# EAGLE board 2x4_v1_CS_print (EAGLE 5.06)
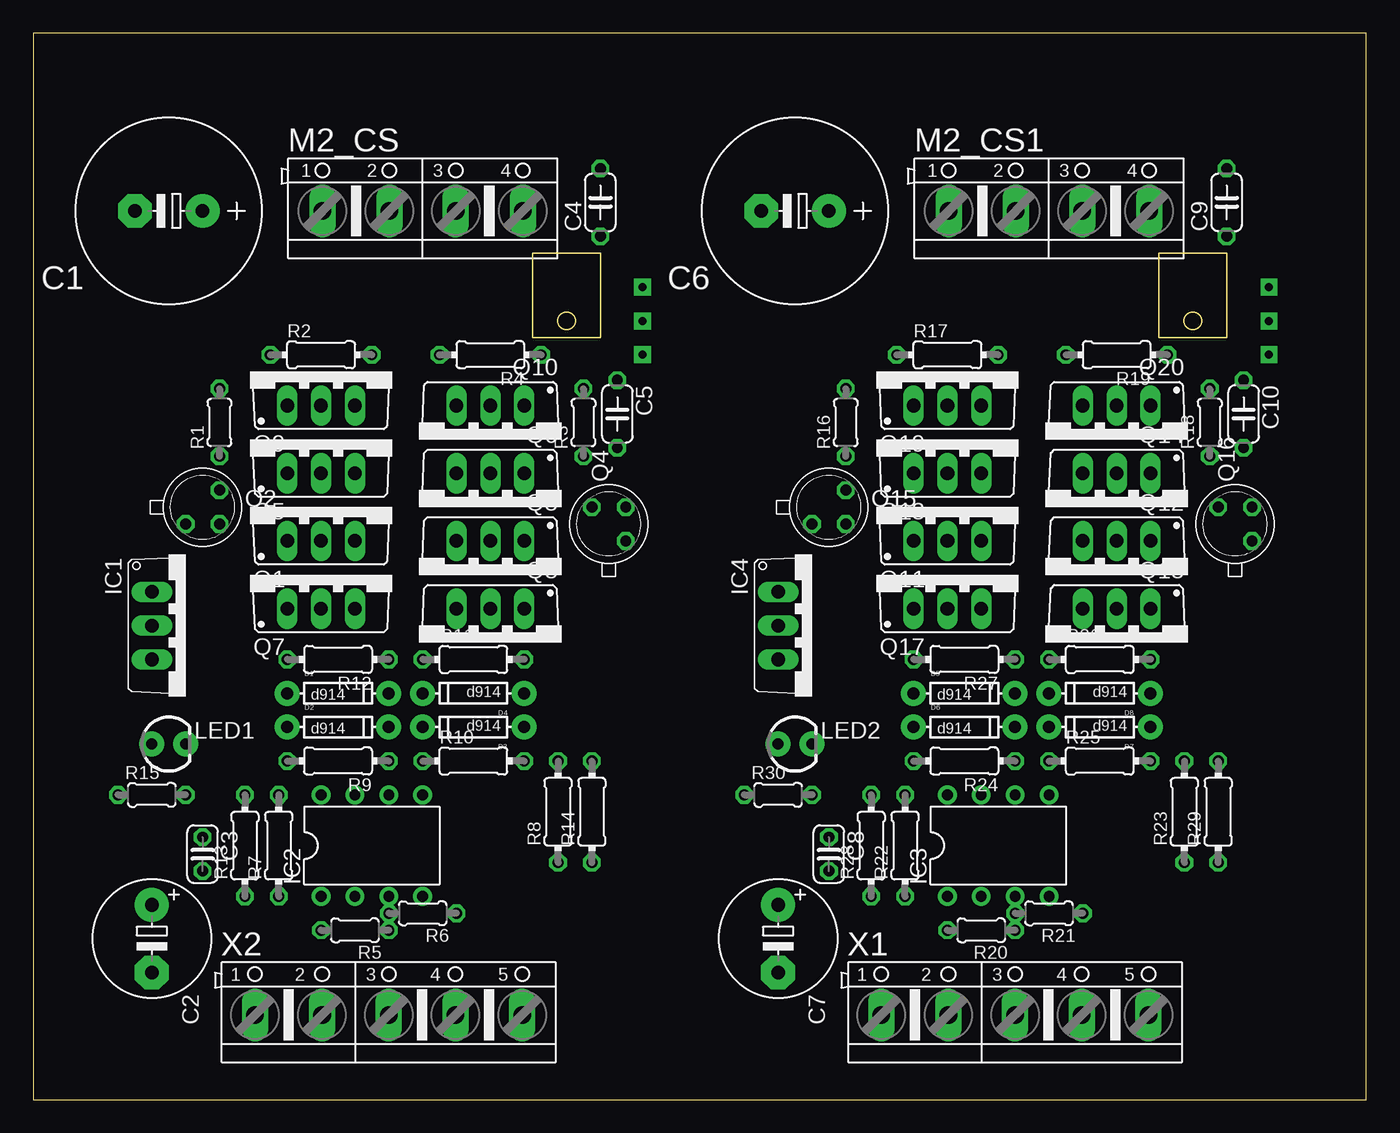
[diagram p0: board, top side]
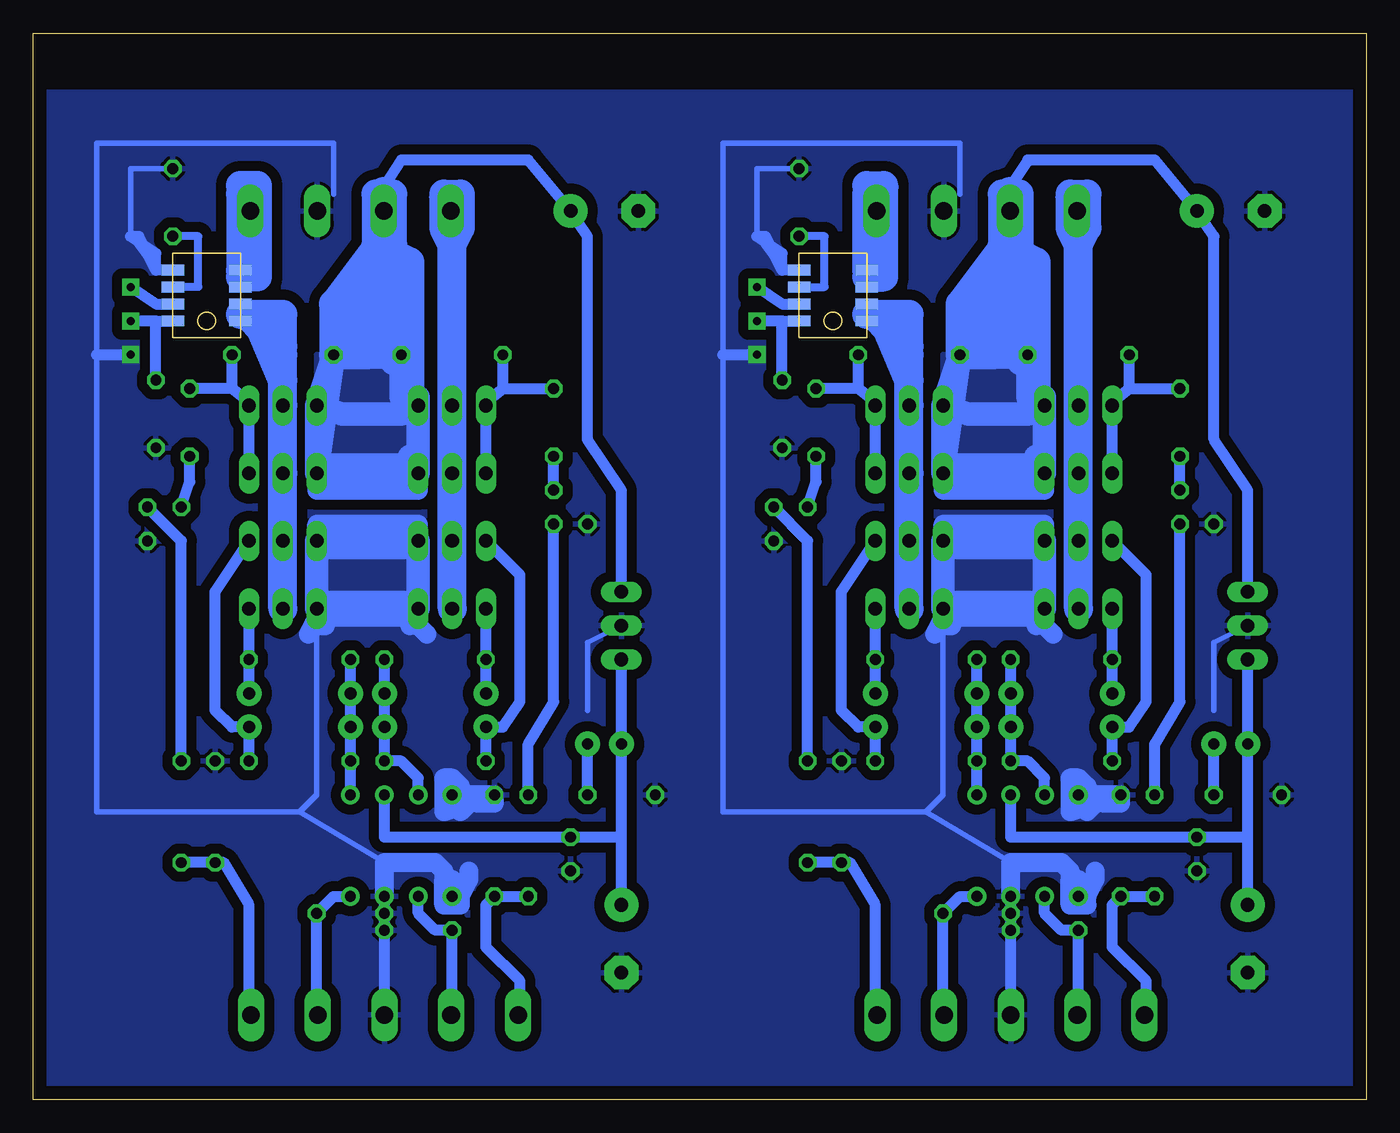
[diagram p1: board, bottom side, seen from below]

Size 100 x 80 mm. Coordinates in mm from the lower left corner, seen from the top.
Outline: 0,0 100,0 100,80 0,80 0,0
Copper layers (1*16): Top 0.035mm / dielectric 1.5mm / Bottom 0.035mm
Design rules "default *": minimum track width 10mil, minimum drill 24mil, track to track 30mil, track to pad 30mil, pad to pad 8mil, via to via 8mil, smd to smd 8mil, copper to edge 40mil, drill to drill 8mil, minimum pad ring 10mil, minimum via ring 8mil, stop-mask expansion 4mil, vias tented up to drill 0mil, thermal gap 10mil

## Footprints (pad centres in the part's own frame; a part is rotated, then mirrored left to right if it is on the bottom)
E5-13 = drill 1.016 pad 2.54 round: + -2.54,0 | drill 1.016 pad 2.54 octagon: - 2.54,0
E5-8,5 = drill 1.016 pad 2.54 round: + -2.54,0 | drill 1.016 pad 2.54 octagon: - 2.54,0
C025-024X044 = drill 0.813 octagon: 1 -1.27,0; 2 1.27,0
C050-024X044 = drill 0.813 octagon: 1 -2.54,0; 2 2.54,0
DIODE-1N4148 = drill 0.9 pad 1.88 round: A -3.81,0; C 3.81,0
TO220V = drill 1.016 long: 1 -2.54,-2.54; 2 0,-2.54; 3 2.54,-2.54
DIL08 = drill 0.8 pad 1.4 round: 1 -3.81,-3.81; 2 -1.27,-3.81; 3 1.27,-3.81; 4 3.81,-3.81; 5 3.81,3.81; 6 1.27,3.81; 7 -1.27,3.81; 8 -3.81,3.81
LED3MM = drill 0.813 pad 1.88 round: A -1.27,0; K 1.27,0
AK500/4 = drill 1.321 long: 1 -7.518,0; 2 -2.489,0; 3 2.489,0; 4 7.518,0
TO220BV = drill 1.016 long: D 0,-2.54; G -2.54,-2.54; S 2.54,-2.54
TO-52 = drill 0.813 octagon: 1 -1.27,-1.27; 2 1.27,-1.27; 3 1.27,1.27
0204/5 = drill 0.813 octagon: 1 -2.54,0; 2 2.54,0
0204/7 = drill 0.813 octagon: 1 -3.81,0; 2 3.81,0
ACS714 = smd 0.813 x 1.676: 1 -1.905,-2.54; 2 -0.635,-2.54; 3 0.635,-2.54; 4 1.905,-2.54; 5 1.905,2.54; 6 0.635,2.54; 7 -0.635,2.54; 8 -1.905,2.54
AK500/5 = drill 1.321 long: 1 -10.033,0; 2 -5.004,0; 3 0,0; 4 5.004,0; 5 10.008,0

## Placement (x,y rotation side)
C1  1000uF  [E5-13]  10.16,66.67 180 top
C2  470uF  [E5-8,5]  8.89,12.06 270 top
C3  1uF  [C025-024X044]  12.7,18.41 270 top
C4  [C050-024X044]  42.55,67.31 90 top
C5  [C050-024X044]  43.81,51.44 270 top
C6  1000uF  [E5-13]  57.15,66.67 180 top
C7  470uF  [E5-8,5]  55.88,12.06 270 top
C8  1uF  [C025-024X044]  59.69,18.41 270 top
C9  [C050-024X044]  89.53,67.31 90 top
C10  [C050-024X044]  90.81,51.44 270 top
D1  d914  [DIODE-1N4148]  22.86,30.48 0 top
D2  d914  [DIODE-1N4148]  22.86,27.94 0 top
D3  d914  [DIODE-1N4148]  33.02,27.94 180 top
D4  d914  [DIODE-1N4148]  33.02,30.48 180 top
D5  d914  [DIODE-1N4148]  69.85,30.48 0 top
D6  d914  [DIODE-1N4148]  69.85,27.94 0 top
D7  d914  [DIODE-1N4148]  80.01,27.94 180 top
D8  d914  [DIODE-1N4148]  80.01,30.48 180 top
IC1  7812TV  [TO220V]  11.43,35.56 270 top
IC2  IR4427  [DIL08]  25.4,19.05 0 top
IC3  IR4427  [DIL08]  72.39,19.05 0 top
IC4  7812TV  [TO220V]  58.42,35.56 270 top
LED1  [LED3MM]  10.16,26.67 0 top
LED2  [LED3MM]  57.15,26.67 0 top
M2_CS  [AK500/4]  29.21,66.67 0 top
M2_CS1  [AK500/4]  76.2,66.67 0 top
Q1  [TO220BV]  21.59,44.45 0 top
Q2  2n7000  [TO-52]  12.7,44.45 0 top
Q3  [TO220BV]  34.29,39.37 180 top
Q4  2n7000  [TO-52]  43.18,43.18 90 top
Q5  [TO220BV]  21.59,49.53 0 top
Q6  [TO220BV]  34.29,44.45 180 top
Q7  [TO220BV]  21.59,39.37 0 top
Q8  [TO220BV]  34.29,34.29 180 top
Q9  [TO220BV]  21.59,54.61 0 top
Q10  [TO220BV]  34.29,49.53 180 top
Q11  [TO220BV]  68.58,44.45 0 top
Q12  [TO220BV]  81.28,39.37 180 top
Q13  [TO220BV]  68.58,49.53 0 top
Q14  [TO220BV]  81.28,44.45 180 top
Q15  2n7000  [TO-52]  59.69,44.45 0 top
Q16  2n7000  [TO-52]  90.17,43.18 90 top
Q17  [TO220BV]  68.58,39.37 0 top
Q18  [TO220BV]  81.28,34.29 180 top
Q19  [TO220BV]  68.58,54.61 0 top
Q20  [TO220BV]  81.28,49.53 180 top
R1  2.2k  [0204/5]  13.97,50.8 90 top
R2  2.2k  [0204/7]  21.59,55.88 0 top
R3  2.2k  [0204/5]  41.27,50.8 90 top
R4  2.2k  [0204/7]  34.29,55.88 180 top
R5  10k  [0204/5]  24.13,12.7 180 top
R6  10k  [0204/5]  29.21,13.97 180 top
R7  10k  [0204/7]  18.41,19.05 90 top
R8  10k  [0204/7]  39.37,21.59 90 top
R9  150  [0204/7]  22.86,25.4 180 top
R10  150  [0204/7]  33.02,25.4 0 top
R11  150  [0204/7]  33.02,33.02 0 top
R12  150  [0204/7]  22.86,33.02 180 top
R13  150  [0204/7]  15.88,19.05 90 top
R14  150  [0204/7]  41.91,21.59 90 top
R15  [0204/5]  8.89,22.86 0 top
R16  2.2k  [0204/5]  60.96,50.8 90 top
R17  2.2k  [0204/7]  68.58,55.88 0 top
R18  2.2k  [0204/5]  88.27,50.8 90 top
R19  2.2k  [0204/7]  81.28,55.88 180 top
R20  10k  [0204/5]  71.12,12.7 180 top
R21  10k  [0204/5]  76.2,13.97 180 top
R22  10k  [0204/7]  65.41,19.05 90 top
R23  10k  [0204/7]  86.36,21.59 90 top
R24  150  [0204/7]  69.85,25.4 180 top
R25  150  [0204/7]  80.01,25.4 0 top
R26  150  [0204/7]  80.01,33.02 0 top
R27  150  [0204/7]  69.85,33.02 180 top
R28  150  [0204/7]  62.87,19.05 90 top
R29  150  [0204/7]  88.9,21.59 90 top
R30  [0204/5]  55.88,22.86 0 top
U$1  ACS714  [ACS714]  40.01,60.33 90 bottom
U$2  ACS714  [ACS714]  87,60.33 90 bottom
X1  [AK500/5]  73.66,6.35 0 top
X2  [AK500/5]  26.67,6.35 0 top

## Library data of the parts
C1-C10 R5 R6 R8-R12 R14 R20 R21 R23-R27 R29 = rcl
D1-D8 LED1 LED2 = SparkFun
IC1 IC4 = linear
IC2 IC3 = ir
M2_CS M2_CS1 X1 X2 = con-ptr500
Q1 Q3 Q5-Q14 Q17-Q20 = transistor-power
Q2 Q4 Q15 Q16 = transistor-fet
R1-R4 R7 R13 R15-R19 R22 R28 R30 = resistor
U$1 U$2 = A-JD3

## Nets
+5V: C5.1 U$1.8
+5V1: C10.1 U$2.8
GND: C1.- C2.- C3.2 C4.2 C5.2 C6.- C7.- C8.2 C9.2 C10.2 IC1.2 IC2.3 IC3.3 IC4.2 M2_CS1.3 M2_CS.3 Q1.S Q2.1 Q3.S Q4.1 Q7.S Q8.S Q11.S Q12.S Q15.1 Q16.1 Q17.S Q18.S R5.1 R6.2 R7.2 R8.2 R15.1 R20.1 R21.2 R22.2 R23.2 R30.1 U$1.5 U$2.5 X1.3 X2.3
MOSFET_CS: Q3.D Q6.D Q8.D Q10.D U$1.1 U$1.2
MOSFET_CS1: Q12.D Q14.D Q18.D Q20.D U$2.1 U$2.2
N$1: Q4.2 R14.2
N$2: Q5.G Q9.G R1.2 R2.1
N$3: Q6.G Q10.G R3.2 R4.1
N$5: M2_CS.1 Q1.D Q5.D Q7.D Q9.D
N$6: M2_CS.4 U$1.3 U$1.4
N$7: Q2.3 R1.1
N$9: Q4.3 R3.1
N$10: R7.1 R13.1 X2.1
N$11: R8.1 R14.1 X2.5
N$12: IC2.4 R6.1 X2.4
N$13: IC2.2 R5.2 X2.2
N$14: D2.A Q1.G R9.2
N$15: C4.1 U$1.6
N$16: C2.+ C3.1 IC1.3 IC2.6 LED1.A
N$17: D3.A Q3.G R10.2
N$18: D3.C D4.C IC2.5 R10.1 R11.1
N$19: D1.C D2.C IC2.7 R9.1 R12.1
N$20: D1.A Q7.G R12.2
N$21: D4.A Q8.G R11.2
N$22: LED1.K R15.2
N$23: Q13.G Q19.G R16.2 R17.1
N$24: Q2.2 R13.2
N$25: Q14.G Q20.G R18.2 R19.1
N$26: M2_CS1.1 Q11.D Q13.D Q17.D Q19.D
N$27: Q15.3 R16.1
N$28: Q16.3 R18.1
N$29: R22.1 R28.1 X1.1
N$30: R23.1 R29.1 X1.5
N$31: IC3.4 R21.1 X1.4
N$32: IC3.2 R20.2 X1.2
N$33: C7.+ C8.1 IC3.6 IC4.3 LED2.A
N$34: D6.A Q11.G R24.2
N$35: D7.A Q12.G R25.2
N$36: D7.C D8.C IC3.5 R25.1 R26.1
N$37: D5.C D6.C IC3.7 R24.1 R27.1
N$38: D5.A Q17.G R27.2
N$39: D8.A Q18.G R26.2
N$40: Q15.2 R28.2
N$41: Q16.2 R29.2
N$42: LED2.K R30.2
N$43: C9.1 U$2.6
N$44: M2_CS1.4 U$2.3 U$2.4
V+: C1.+ IC1.1 M2_CS.2 Q5.S Q6.S Q9.S Q10.S R2.2 R4.2
V+1: C6.+ IC4.1 M2_CS1.2 Q13.S Q14.S Q19.S Q20.S R17.2 R19.2
VOUT: U$1.7
VOUT1: U$2.7

## Tracks (layer width: path | path; a pad name or v marks a point on that pad's centre or on a via)
+5V  (via drill 0.6 pad 1.27)
  Bottom 0.813: 43.81,58.42 U$1.8 | 43.81,58.42 v45.72,58.42 | C5.1 43.81,58.42
+5V1  (via drill 0.6 pad 1.27)
  Bottom 0.813: 90.81,58.42 U$2.8 | 90.81,58.42 v92.71,58.42 | C10.1 90.81,58.42
GND  (via drill 0.6 pad 1.27)
  Bottom 0.406: 26.67,17.78 33.02,21.59 | 30.48,67.94 30.48,71.75 48.26,71.75 48.26,55.88 48.26,21.59 33.02,21.59 | 11.43,29.21 11.43,34.29 IC1.2 | 31.75,35.56 31.75,22.86 33.02,21.59 | 43.81,62.23 45.72,64.77 45.72,69.85 C4.2 | 73.66,17.78 80.01,21.59 | 77.47,67.94 77.47,71.75 95.25,71.75 95.25,55.88 95.25,21.59 80.01,21.59 | 58.42,29.21 58.42,34.29 IC4.2 | 78.74,35.56 78.74,22.86 80.01,21.59 | 90.81,62.23 92.71,64.77 92.71,69.85 C9.2
  Bottom 0.813: IC2.3 R5.1 X2.3 | 48.26,55.88 v45.72,55.88 | U$1.5 43.81,62.23 | 43.81,62.23 43.81,63.5 45.72,64.77 45.09,64.77 43.81,62.23 | IC3.3 R20.1 X1.3 | 95.25,55.88 v92.71,55.88 | U$2.5 90.81,62.23 | 90.81,62.23 90.81,63.5 92.71,64.77 92.08,64.77 90.81,62.23
  Bottom 1.422: 22.23,24.13 21.59,24.13 20.95,23.5 20.95,22.86 R7.2 18.41,22.23 19.68,22.23 | 22.23,24.13 20.95,21.59 20.32,22.23 22.23,21.59 22.23,24.13 | 20.32,17.14 20.32,16.51 20.95,15.24 20.95,14.61 22.23,14.61 | 22.23,14.61 22.23,16.51 21.59,16.51 21.59,15.88 | 22.23,14.61 22.23,17.14 22.86,17.78 26.67,17.78 IC2.3 | Q1.S 24.13,43.18 31.75,43.18 31.75,41.27 24.13,41.27 | 24.13,37.47 31.75,37.47 31.11,36.83 Q8.S 31.75,36.2 | 31.75,36.2 31.75,35.56 31.11,35.56 31.11,36.2 24.13,36.2 24.13,35.56 | 24.13,35.56 24.77,35.56 | 24.13,35.56 23.5,34.92 | 31.75,36.2 32.38,34.92 | 69.22,24.13 68.58,24.13 67.94,23.5 67.94,22.86 R22.2 65.41,22.23 66.67,22.23 | 69.22,24.13 67.94,21.59 67.31,22.23 69.22,21.59 69.22,24.13 | 67.31,17.14 67.31,16.51 67.94,15.24 67.94,14.61 69.22,14.61 | 69.22,14.61 69.22,16.51 68.58,16.51 68.58,15.88 | 69.22,14.61 69.22,17.14 69.85,17.78 73.66,17.78 IC3.3 | Q11.S 71.12,43.18 78.74,43.18 78.74,41.27 71.12,41.27 | 71.12,37.47 78.74,37.47 78.11,36.83 Q18.S 78.74,36.2 | 78.74,36.2 78.74,35.56 78.11,35.56 78.11,36.2 71.12,36.2 71.12,35.56 | 71.12,35.56 71.75,35.56 | 71.12,35.56 70.48,34.92 | 78.74,36.2 79.38,34.92
  Bottom 1.778: Q7.S 24.13,37.47 24.13,41.27 Q1.S Q3.S 31.75,41.27 31.75,37.47 Q8.S | Q17.S 71.12,37.47 71.12,41.27 Q11.S Q12.S 78.74,41.27 78.74,37.47 Q18.S
  pour Bottom: 0.64,75.56 50.16,75.56 50.16,0.64 0.64,0.64
  pour Bottom: 50.16,75.56 102.23,75.56 102.23,0.64 50.16,0.64
MOSFET_CS  (2 unrouted)
  Bottom 0.254: Q6.D 34.8,46.99
  Bottom 1.778: Q8.D Q3.D | 34.29,56.52 35.69,58.93
  Bottom 2.184: Q8.D Q6.D Q10.D 34.29,53.98 | 34.29,55.88 34.29,56.52 34.29,58.93 35.69,58.93 36.96,58.93 | 34.29,53.98 34.29,55.88 | 36.96,58.93 37.47,58.93 | 34.29,55.88 36.96,58.93 | 34.29,53.98 36.2,58.42
MOSFET_CS1  (2 unrouted)
  Bottom 0.254: Q14.D 81.79,46.99
  Bottom 1.778: Q18.D Q12.D | 81.28,56.52 82.68,58.93
  Bottom 2.184: Q18.D Q14.D Q20.D 81.28,53.98 | 81.28,55.88 81.28,56.52 81.28,58.93 82.68,58.93 83.95,58.93 | 81.28,53.98 81.28,55.88 | 83.95,58.93 84.45,58.93 | 81.28,55.88 83.95,58.93 | 81.28,53.98 83.19,58.42
N$1
  Bottom 0.813: R14.2 41.91,41.91 Q4.2
N$2
  Bottom 0.254: Q9.G 18.8,52.32 19.05,52.32
  Bottom 0.813: 17.78,53.34 R1.2 | 17.78,53.34 R2.1 | 17.78,53.34 19.05,52.32 Q9.G Q5.G
N$3
  Bottom 0.254: Q10.G 37.08,52.32 36.83,52.32
  Bottom 0.813: Q6.G Q10.G 36.83,52.32 38.1,53.34 | 38.1,53.34 R4.1 | 38.1,53.34 R3.2
N$4
  Bottom 2.184: 26.67,67.94 26.67,66.67 | 26.67,67.94 27.3,67.94 27.3,64.14 | 26.67,67.94 26.04,67.94 26.04,64.14
N$5
  Bottom 0.254: M2_CS.1 21.59,68.58 22.23,67.94
  Bottom 1.778: Q7.D Q1.D Q5.D Q9.D 21.59,64.14
  Bottom 2.184: Q7.D 21.59,64.14 | 21.59,64.14 22.23,67.94 | 22.23,67.94 20.95,67.94 20.95,65.41 21.59,64.14 | 21.59,64.14 22.23,65.41 22.23,67.94 | 22.23,67.94 M2_CS.1
N$6  (1 unrouted)
  Bottom 0.254: M2_CS.4 37.08,68.33 36.2,68.33
  Bottom 1.778: 36.83,67.94 36.83,61.72 | 36.2,61.72 36.2,67.94
  Bottom 2.184: 37.47,61.72 36.83,61.72 36.2,61.72 36.2,68.33 36.2,68.58 37.47,68.58 36.83,67.94 37.47,67.94 U$1.4
N$7
  Bottom 0.813: Q2.3 R1.1
N$8  (via drill 0.6 pad 1.27)
  Bottom 0.813: 43.18,59.69 43.81,59.69 v45.72,60.96
N$9
  Bottom 0.813: Q4.3 41.27,46.35 R3.1
N$10
  Bottom 0.254: X2.1 16.51,6.35
  Bottom 0.813: R13.1 R7.1 19.05,14.61 19.05,11.43 16.51,8.89 16.51,6.35 16.51,5.08
N$11
  Bottom 0.254: X2.5 36.83,6.35
  Bottom 0.813: 36.83,5.08 36.83,6.35 36.83,14.61 38.73,17.78 R8.1 R14.1
N$12
  Bottom 0.254: X2.4 31.75,6.35
  Bottom 0.813: IC2.4 30.48,15.24 R6.1 31.75,6.35 31.75,5.08
N$13
  Bottom 0.254: X2.2 21.59,6.35
  Bottom 0.813: IC2.2 24.13,13.97 22.86,12.7 R5.2 21.59,6.35 21.59,5.08
N$14
  Bottom 0.813: Q1.G 16.51,39.37 16.51,29.84 17.78,27.94 D2.A R9.2
N$15
  Bottom 0.61: U$1.6 40.64,60.96 40.64,64.77 C4.1
N$16
  Bottom 0.813: IC2.6 26.67,19.68 C3.1 8.89,19.68 | C2.+ 8.89,19.68 | 8.89,19.68 LED1.A IC1.3
N$17
  Bottom 0.813: Q3.G 39.37,38.1 39.37,29.21 38.1,27.94 D3.A R10.2
N$18
  Bottom 0.813: IC2.5 R10.1 D3.C D4.C R11.1
N$19
  Bottom 0.813: IC2.7 24.13,24.13 25.4,25.4 R9.1 D2.C D1.C R12.1
N$20
  Bottom 0.813: Q7.G R12.2 D1.A
N$21
  Bottom 0.813: Q8.G R11.2 D4.A
N$22
  Bottom 0.813: R15.2 LED1.K
N$23
  Bottom 0.254: Q19.G 65.79,52.32 66.04,52.32
  Bottom 0.813: 64.77,53.34 R16.2 | 64.77,53.34 R17.1 | 64.77,53.34 66.04,52.32 Q19.G Q13.G
N$24
  Bottom 0.813: R13.2 15.88,26.67 13.97,29.84 Q2.2
N$25
  Bottom 0.254: Q20.G 84.07,52.32 83.82,52.32
  Bottom 0.813: Q14.G Q20.G 83.82,52.32 85.09,53.34 | 85.09,53.34 R19.1 | 85.09,53.34 R18.2
N$26
  Bottom 0.254: M2_CS1.1 68.58,68.58 69.22,67.94
  Bottom 1.778: Q17.D Q11.D Q13.D Q19.D 68.58,64.14
  Bottom 2.184: Q17.D 68.58,64.14 | 68.58,64.14 69.22,67.94 | 69.22,67.94 67.94,67.94 67.94,65.41 68.58,64.14 | 68.58,64.14 69.22,65.41 69.22,67.94 | 69.22,67.94 M2_CS1.1
N$27
  Bottom 0.813: Q15.3 R16.1
N$28
  Bottom 0.813: Q16.3 88.27,46.35 R18.1
N$29
  Bottom 0.254: X1.1 63.5,6.35
  Bottom 0.813: R28.1 R22.1 66.04,14.61 66.04,11.43 63.5,8.89 63.5,6.35 63.5,5.08
N$30
  Bottom 0.254: X1.5 83.82,6.35
  Bottom 0.813: 83.82,5.08 83.82,6.35 83.82,14.61 85.72,17.78 R23.1 R29.1
N$31
  Bottom 0.254: X1.4 78.74,6.35
  Bottom 0.813: IC3.4 77.47,15.24 R21.1 78.74,6.35 78.74,5.08
N$32
  Bottom 0.254: X1.2 68.58,6.35
  Bottom 0.813: IC3.2 71.12,13.97 69.85,12.7 R20.2 68.58,6.35 68.58,5.08
N$33
  Bottom 0.813: IC3.6 73.66,19.68 C8.1 55.88,19.68 | C7.+ 55.88,19.68 | 55.88,19.68 LED2.A IC4.3
N$34
  Bottom 0.813: Q11.G 63.5,39.37 63.5,29.84 64.77,27.94 D6.A R24.2
N$35
  Bottom 0.813: Q12.G 86.36,38.1 86.36,29.21 85.09,27.94 D7.A R25.2
N$36
  Bottom 0.813: IC3.5 R25.1 D7.C D8.C R26.1
N$37
  Bottom 0.813: IC3.7 71.12,24.13 72.39,25.4 R24.1 D6.C D5.C R27.1
N$38
  Bottom 0.813: Q17.G R27.2 D5.A
N$39
  Bottom 0.813: Q18.G R26.2 D8.A
N$40
  Bottom 0.813: R28.2 62.87,26.67 60.96,29.84 Q15.2
N$41
  Bottom 0.813: R29.2 88.9,41.91 Q16.2
N$42
  Bottom 0.813: R30.2 LED2.K
N$43
  Bottom 0.61: U$2.6 87.63,60.96 87.63,64.77 C9.1
N$44  (1 unrouted)
  Bottom 0.254: M2_CS1.4 84.07,68.33 83.19,68.33
  Bottom 1.778: 83.82,61.72 83.82,67.94 | 83.19,61.72 83.19,67.94
  Bottom 2.184: 84.45,61.72 83.82,61.72 83.19,61.72 83.19,68.33 83.19,68.58 84.45,68.58 83.82,67.94 84.45,67.94 U$2.4
N$45  (via drill 0.6 pad 1.27)
  Bottom 0.813: 90.17,59.69 90.81,59.69 v92.71,60.96
N$46
  Bottom 2.184: 73.66,67.94 73.66,66.67 | 73.66,67.94 74.3,67.94 74.3,64.14 | 73.66,67.94 73.03,67.94 73.03,64.14
V+
  Bottom 0.254: 26.67,68.58 M2_CS.2
  Bottom 0.406: Q6.S Q5.S | R2.2 24.77,56.52 | 26.67,57.15 30.48,56.52 R4.2
  Bottom 0.813: IC1.1 8.89,45.72 11.43,49.53 11.43,64.77 C1.+ 15.88,70.48 25.4,70.48 26.67,68.58 26.67,67.94
  Bottom 1.422: Q6.S Q5.S 24.13,45.72 31.75,45.72 Q6.S
  Bottom 1.778: R4.2 Q6.S 31.75,47.62 | R2.2 26.04,55.24 | R2.2 25.4,52.7 Q9.S | Q9.S 24.13,47.62 | Q5.S 24.13,47.62 | 26.67,60.96 R2.2 | Q10.S 31.75,47.62 | Q10.S 29.84,51.44 25.4,51.44 24.77,52.07 Q9.S | R4.2 Q10.S | 26.67,60.96 24.77,56.52 26.67,57.15 26.67,60.96 | R4.2 26.67,60.96 | R4.2 29.21,55.88 | Q9.S 24.13,52.7 24.77,53.34 24.77,55.88 R2.2 | 31.75,47.62 24.13,47.62 | 24.13,47.62 24.77,48.26
  Bottom 2.184: 27.94,55.88 R2.2 25.4,62.87 | 26.04,63.5 26.67,64.14 30.48,59.69 | 26.04,63.5 25.4,62.87 | R4.2 27.94,55.88 | 27.94,55.88 27.94,60.33 R4.2 | 25.4,62.87 24.77,62.87 | 24.77,62.87 24.77,56.52 | 24.77,56.52 24.77,55.88 | 24.77,56.52 24.77,52.07 | 26.04,63.5 24.77,62.87 | 26.67,64.77 30.48,59.69 | 30.48,59.69 R4.2
  Bottom 2.54: 26.67,67.94 26.67,64.77 26.67,64.14 26.67,60.96
  pour Bottom: 24.13,56.52 24.13,46.99 31.75,46.99 31.75,55.88 28.57,56.52
V+1
  Bottom 0.254: 73.66,68.58 M2_CS1.2
  Bottom 0.406: Q14.S Q13.S | R17.2 71.75,56.52 | 73.66,57.15 77.47,56.52 R19.2
  Bottom 0.813: IC4.1 55.88,45.72 58.42,49.53 58.42,64.77 C6.+ 62.87,70.48 72.39,70.48 73.66,68.58 73.66,67.94
  Bottom 1.422: Q14.S Q13.S 71.12,45.72 78.74,45.72 Q14.S
  Bottom 1.778: R19.2 Q14.S 78.74,47.62 | R17.2 73.03,55.24 | R17.2 72.39,52.7 Q19.S | Q19.S 71.12,47.62 | Q13.S 71.12,47.62 | 73.66,60.96 R17.2 | Q20.S 78.74,47.62 | Q20.S 76.83,51.44 72.39,51.44 71.75,52.07 Q19.S | R19.2 Q20.S | 73.66,60.96 71.75,56.52 73.66,57.15 73.66,60.96 | R19.2 73.66,60.96 | R19.2 76.2,55.88 | Q19.S 71.12,52.7 71.75,53.34 71.75,55.88 R17.2 | 78.74,47.62 71.12,47.62 | 71.12,47.62 71.75,48.26
  Bottom 2.184: 74.93,55.88 R17.2 72.39,62.87 | 73.03,63.5 73.66,64.14 77.47,59.69 | 73.03,63.5 72.39,62.87 | R19.2 74.93,55.88 | 74.93,55.88 74.93,60.33 R19.2 | 72.39,62.87 71.75,62.87 | 71.75,62.87 71.75,56.52 | 71.75,56.52 71.75,55.88 | 71.75,56.52 71.75,52.07 | 73.03,63.5 71.75,62.87 | 73.66,64.77 77.47,59.69 | 77.47,59.69 R19.2
  Bottom 2.54: 73.66,67.94 73.66,64.77 73.66,64.14 73.66,60.96
  pour Bottom: 71.12,56.52 71.12,46.99 78.74,46.99 78.74,55.88 75.56,56.52